# Altium PCB MotorControllerV1.PcbDoc
Units mil, origin at the board's own origin, x right, y up, seen from the top; angles counter-clockwise.
Board outline 2755 x 2065 mil, 2 copper layers (Top Layer, Bottom Layer); 68 components, 38 nets, 220 pads, 58 vias.
Unrouted connection lines stored in the file: 5.
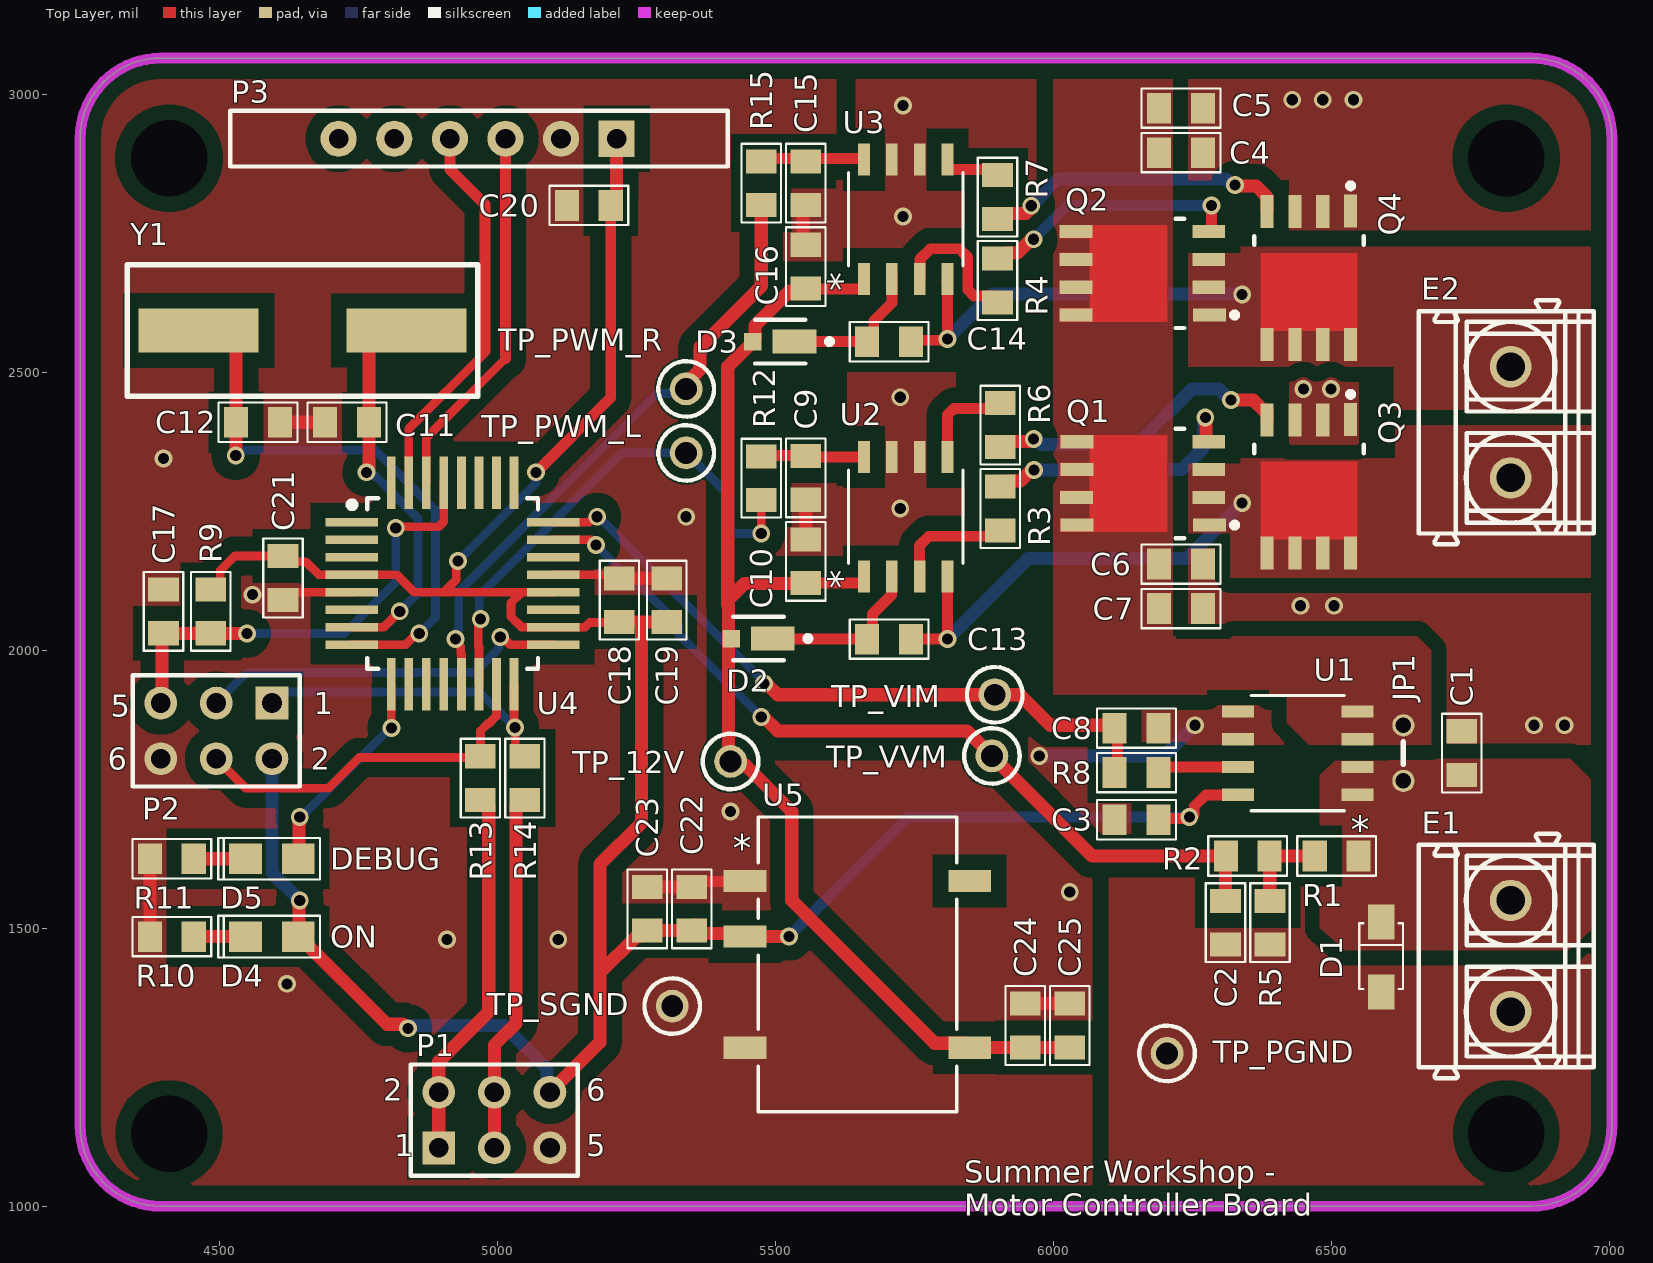
[diagram p0: Top Layer view]
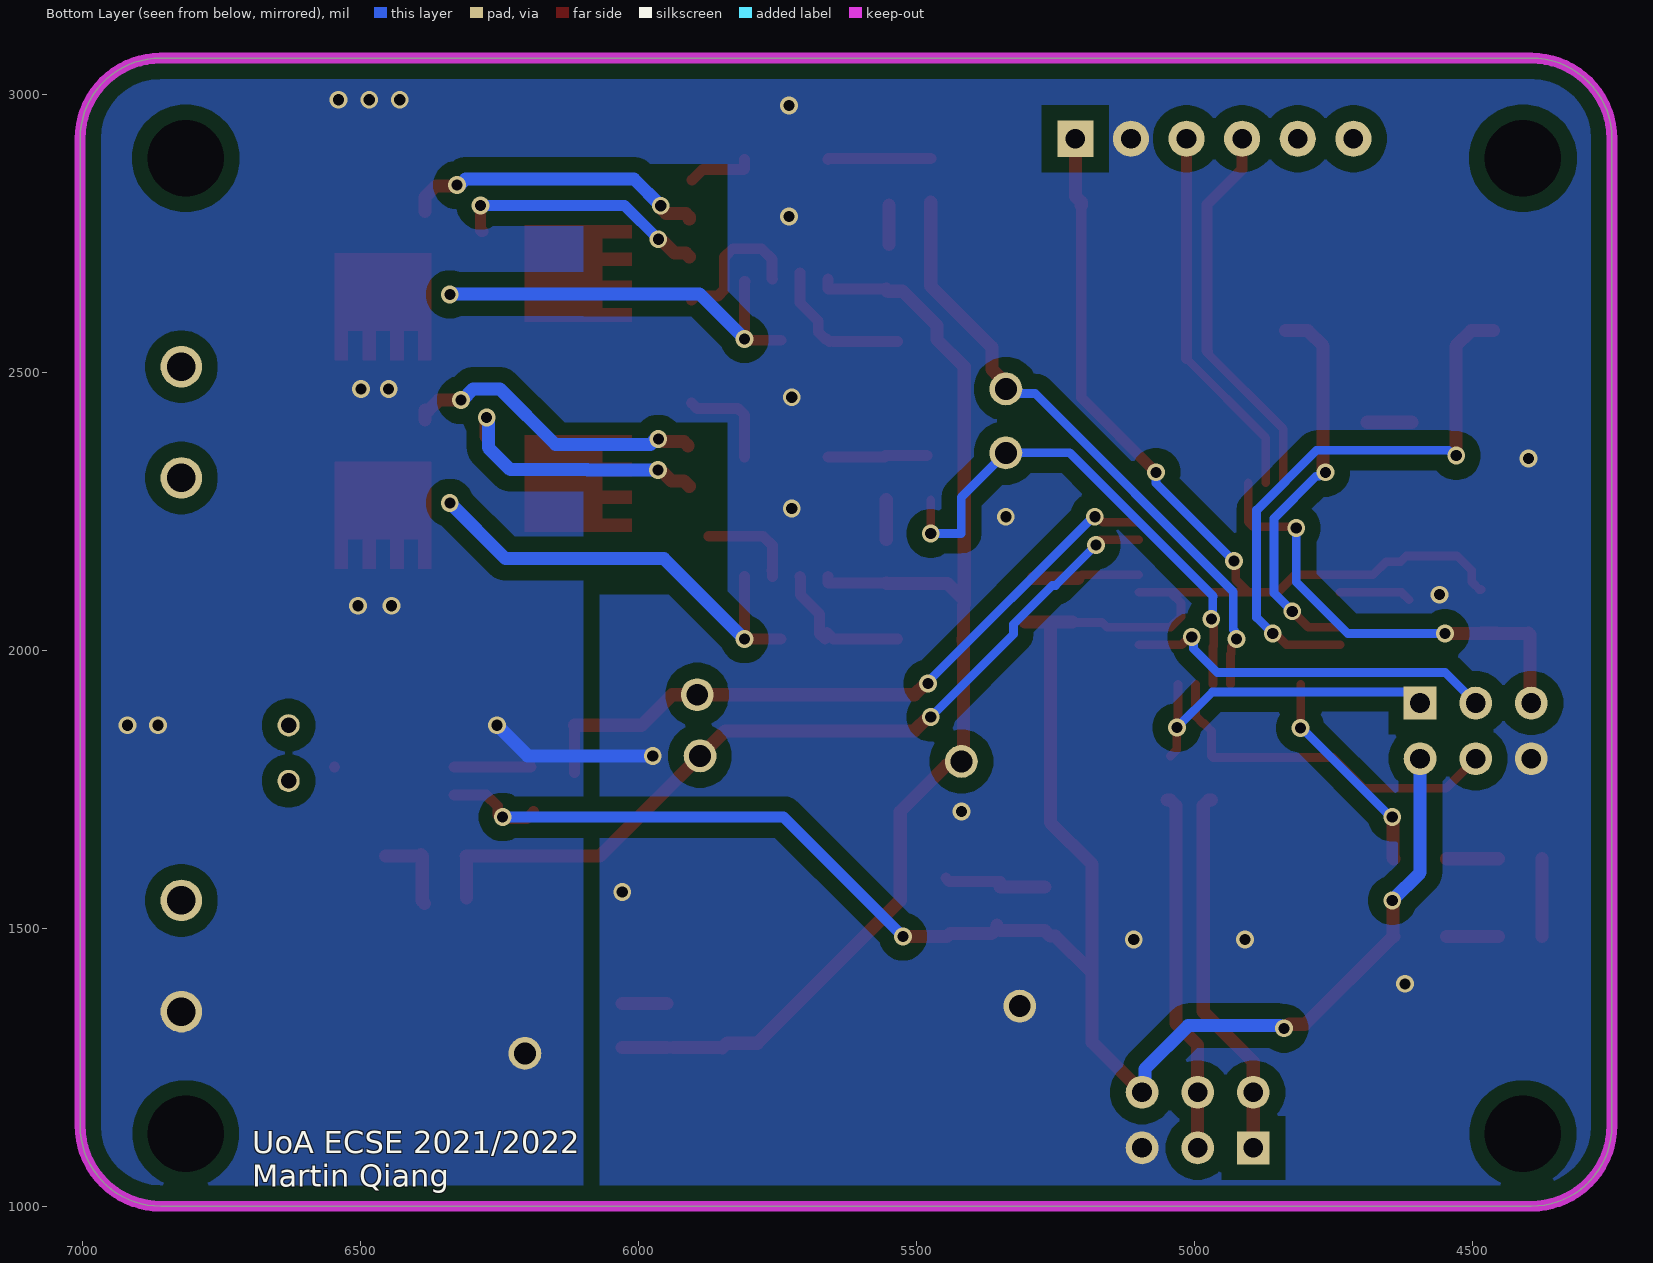
[diagram p1: Bottom Layer view, seen from below]

## Layer stack, top to bottom
Top Solder: solder mask 0.4, Solder Resist, Dk 3.5
Top Layer: signal copper 1.4
Dielectric 1: dielectric 12.6, FR-4, Dk 4.8
Bottom Layer: signal copper 1.4
Bottom Solder: solder mask 0.4, Solder Resist, Dk 3.5

## Board outline
4250,1145 4250,2920 cw(c4395,2920) 4395,3065 6860,3065 cw(c6860,2920) 7005,2920 7005,1145 cw(c6860,1145) 6860,1000 4395,1000 cw(c4395,1145)

## Design rules (kind name [scope] priority, off if disabled: settings)
BoardOutlineClearance [All] p1: gap=19.68 ignorepadtopadclearanceinfootprint=FALSE
Clearance "Polygon Pouring rule" [All] p1: gap=15.75 ignorepadtopadclearanceinfootprint=FALSE except(27.56: Arc-Poly Track-Poly SMDPad-Poly THPad-Poly Via-Poly Fill-Poly Poly-Poly Poly-Region Poly-Text Poly-Hole)
Clearance Clearance_1 [All] p2: gap=15.75 ignorepadtopadclearanceinfootprint=FALSE
Height [All] p1: minheight=0 maxheight=1968.5 prefheight=500
HoleSize [All] p1: absolutevalues=TRUE maxlimit=236.22 minlimit=19.68 maxpercent=80.000 minpercent=20.000
MinimumAnnularRing [All] p1: minimumring=3
MinimumSolderMaskSliver [All] p1: minsoldermaskwidth=3.94
PlaneConnect [All] p1: planeconnectstyle=Relief reliefexpansion=23.62 reliefentries=4 reliefconductorwidth=23.62 reliefairgap=15.75
PolygonConnect PolygonConnect_1 [All] p1: connectstyle=Direct reliefconductorwidth=23.62 reliefentries=4 polygonreliefangle="90 Angle" airgapwidth=15.75
RoutingCorners [All] p1: cornerstyle=Round minsetback=100 maxsetback=100
RoutingVias [All] p1: holewidth=23.62 width=39.37 viastyle="Through Hole" minholewidth=19.68 minwidth=31.5 maxholewidth=39.37 maxwidth=78.74
SilkToSilkClearance [All] p1: silktosilkclearance=3.94
SilkToSolderMaskClearance [IsPad] p1: minsilkscreentomaskgap=3.94 clearancetoexposedcopper=TRUE
SolderMaskExpansion [All] p1: expansion=4 istentingtop=FALSE
Width [All] p1: maxlimit=393.7 minlimit=15.75 preferedwidth=23.62
23 further rules are at their usual default settings.

## Components (designator, comment, footprint, x,y, rotation, side; value= is the part's Value field where it differs from the comment)
C1 "100nF" "0805 CAP" 6735,1815 r90 top
C2 "*" "0805 CAP" 6310,1510 r270 top
C3 "100nF" "0805 CAP" 6150,1695 r180 top
C4 "*" "0805 CAP" 6230,2895 r180 top
C5 "*" "0805 CAP" 6230,2975 r180 top
C6 "*" "0805 CAP" 6230,2155 r180 top
C7 "*" "0805 CAP" 6230,2075 r180 top
C8 "*" "0805 CAP" 6150,1860 r0 top
C9 "*" "0805 CAP" 5555,2310 r90 top
C10 "100nF" "0805 CAP" 5555,2160 r270 top
C11 "22pF" "0805 CAP" 4730,2410 r180 top
C12 "22pF" "0805 CAP" 4570,2410 r0 top
C13 "*" "0805 CAP" 5705,2020 r0 top
C14 "*" "0805 CAP" 5705,2555 r0 top
C15 "*" "0805 CAP" 5555,2840 r90 top
C16 "100nF" "0805 CAP" 5555,2690 r270 top
C17 "*" "0805 CAP" 4400,2070 r90 top
C18 "100nF" "0805 CAP" 5220,2090 r90 top
C19 "100nF" "0805 CAP" 5305,2090 r90 top
C20 "100nF" "0805 CAP" 5165,2800 r180 top
C21 "100nF" "0805 CAP" 4615,2130 r270 top
C22 "100nF" "0805 CAP" 5350,1535 r90 top
C23 "4.7uF" "0805 CAP" 5270,1535 r90 top
C24 "100nF" "0805 CAP" 5950,1325 r90 top
C25 "2.2uF" "0805 CAP" 6030,1325 r90 top
D1 "BZT52H-B4V7" SOD123 6590,1450 r90 top
D2 "MSS1P3L-M3/89A" FP-96591-MFG 5470.28,2021.06 r180 top value=65pF
D3 "MSS1P3L-M3/89A" FP-96591-MFG 5509.21,2555 r180 top value=65pF
D4 "LTST-C170KGKT" "0805 LED" 4595,1485 r180 top
D5 "LTST-C170KGKT" "0805 LED" 4595,1625 r180 top
E1 "Input1" PM_5_08_90_02 6815,1450 r90 top
E2 "Output" PM_5_08_90_02 6815,2410 r90 top
JP1 "0R" "Axial 0.1" 6630,1765 r90 top
P1 "Input from Converter" HDR2X3 4895,1105 r0 top
P2 "ISP Header" HDR2X3 4595,1905 r180 top
P3 "BLE Module Header" HM10_HDR1X6 5215,2920 r180 top
Q1 "IRFH7440TRPBF" Infineon_PG-TDSON-8_MFG#1 6161.1,2300 r180 top
Q2 "IRFH7440TRPBF" Infineon_PG-TDSON-8_MFG#2 6161.1,2677.95 r180 top
Q3 "IRFH7440TRPBF" Infineon_PG-TDSON-8_MFG#2 6460,2295 r270 top
Q4 "IRFH7440TRPBF" Infineon_PG-TDSON-8_MFG#2 6460,2670 r270 top
R1 "*" "0805 RES" 6510,1630 r0 top
R2 "*" "0805 RES" 6350,1630 r180 top
R3 "*" "0805 RES" 5905,2255 r90 top
R4 "*" "0805 RES" 5900,2665 r90 top
R5 "*" "0805 RES" 6390,1510 r270 top
R6 "*" "0805 RES" 5905,2405 r90 top
R7 "*" "0805 RES" 5900,2815 r270 top
R8 "*" "0805 RES" 6150,1780 r180 top
R9 "*" "0805 RES" 4485,2070 r90 top
R10 "*" "0805 RES" 4415,1485 r0 top
R11 "*" "0805 RES" 4415,1625 r0 top
R12 "*" "0805 RES" 5475,2309.37 r270 top
R13 "*" "0805 RES" 4970,1770 r270 top
R14 "*" "0805 RES" 5050,1770 r270 top
R15 "*" "0805 RES" 5475,2840 r270 top
TP_12V "5003" TP_TH 5420,1800 r90 top
TP_PGND "5003" TP_TH 6205,1275 r90 top
TP_PWM_L "5003" TP_TH 5340,2355 r90 top
TP_PWM_R "5003" TP_TH 5340,2470 r90 top
TP_SGND "5003" TP_TH 5315,1360 r90 top
TP_VIM "5003" TP_TH 5895,1920 r90 top
TP_VVM "5003" TP_TH 5890,1810 r90 top
U1 "TMCS1100A4QDR" SOIC8_D_TEX 6440,1815 r180 top
U2 "MIC4605-2YM" MIC4605-2YM 5735,2240 r90 top
U3 "MIC4605-2YM" MIC4605-2YM 5735,2775 r90 top
U4 "ATmega328PB MCU" "32 - TQFP" 4920,2120 r0 top
U5 "ISE0312A" ISE0312A 5648,1435 r0 top
Y1 "SMT-XTAL 16MHz" HC49-US 4650,2575 r180 top

## Footprints (in the part's own frame and the unit in brackets; to place one, negate y for a bottom-side part, rotate by r counter-clockwise, add the part's x,y. Pads: shape width x height; smd on the part's side, far side on the other; paste and mask are expansions set on the pad)
"32 - TQFP" [mm]
  rect 2.4x0.4 smd: 1(-4.6,2.8) 2(-4.6,2) 3(-4.6,1.2) 4(-4.6,0.4) 5(-4.6,-0.4) 6(-4.6,-1.2) 7(-4.6,-2) 8(-4.6,-2.8) 17(4.6,-2.8) 18(4.6,-2) 19(4.6,-1.2) 20(4.6,-0.4) 21(4.6,0.4) 22(4.6,1.2) 23(4.6,2) 24(4.6,2.8)
  rect 0.4x2.4 smd: 9(-2.8,-4.6) 10(-2,-4.6) 11(-1.2,-4.6) 12(-0.4,-4.6) 13(0.4,-4.6) 14(1.2,-4.6) 15(2,-4.6) 16(2.8,-4.6) 25(2.8,4.6) 26(2,4.6) 27(1.2,4.6) 28(0.4,4.6) 29(-0.4,4.6) 30(-1.2,4.6) 31(-2,4.6) 32(-2.8,4.6)
  silkscreen extent -4.74,-3.9 3.9,3.9, body extent -4.5,-4.5 4.5,4.5, height 1.3
"0805 CAP" [mm] "http://www.digikey.co.nz/Web%20Export/Supplier%20Content/Vishay_8026/PDF/VishayBeyschlag_SolderPad.pdf?redirected=1 with dimension G modified by +0.25mm"
  rect 1.1x1.4 smd: 1(-1,0) 2(1,0)
  silkscreen extent -1.8,-0.9 1.8,0.9, body extent -1.04,-0.66 1.04,0.66, height 0.61
"0805 LED" [mm] "RED AS AlGaAs SMD LED, Body; 2mm x 1.25 mm (LxW)"
  rect 1.5x1.4 smd: 1(-1.2,0) 2(1.2,0)
  silkscreen extent -2.2,-0.95 2.45,0.95, body extent -1,-0.63 1,0.63, height 1.1
"0805 RES" [mm] "http://www.digikey.co.nz/Web%20Export/Supplier%20Content/Vishay_8026/PDF/VishayBeyschlag_SolderPad.pdf?redirected=1 with dimension G modified by +0.25mm"
  rect 1.1x1.4 smd: 1(-1,0) 2(1,0)
  silkscreen extent -1.8,-0.9 1.8,0.9, body extent -1.04,-0.66 1.04,0.66, height 0.61
"Axial 0.1" [mil]
  round 40 hole 28: 1(0,0) 2(100,0)
  silkscreen extent 30,0 70,0
FP-96591-MFG [mm]
  rect 2x1.1 smd paste+0 mask+0: 1(-0.65,0)
  rect 0.8x0.8 smd paste+0 mask+0: 2(1.25,0)
  silkscreen extent -2.38,-1 1.15,1, body extent -1.75,-0.8 1.75,0.8, height 0.25
HC49-US [mm] "20Mhz Crystal"
  rect 5.5x2 smd: 1(-4.75,0) 2(4.75,0)
  silkscreen extent -8,-3 8,3, body extent -4.77,-2.4 4.79,2.4, height 3.8
HDR2X3 [mm] "Connector; Header; 3x2 Position"
  rect 1.5x1.5 hole 0.9: 1(0,0)
  round 1.5 hole 0.9: 2(0,2.54) 3(2.54,0) 4(2.54,2.54) 5(5.08,0) 6(5.08,2.54)
  silkscreen extent -1.27,-1.27 6.35,3.81
HM10_HDR1X6 [mil] "Connector; Header; 6 Position"
  rect 65x65 hole 35.43: 1(0,0)
  round 65 hole 35.43: 2(100,0) 3(200,0) 4(300,0) 5(400,0) 6(500,0)
  silkscreen extent -200,-50 695,50, body extent -142,-39 571,228, height 1843
Infineon_PG-TDSON-8_MFG#1 [mm]
  rect 1.5x0.6 smd paste-1000 mask+0: 1(-3.048,1.905) 2(-3.02,0.635) 3(-3.02,-0.635) 4(-3.02,-1.905) 5(2.997,1.905) 6(3.023,0.635) 7(2.997,-0.635) 8(2.997,-1.905)
  Top Layer region: -1.125,2.205 3.77,2.205 3.77,1.605 2.42,1.605 2.42,0.935 3.77,0.935 3.77,0.335 2.42,0.335 2.42,-0.335 3.77,-0.335 3.77,-0.935 2.42,-0.935 2.42,-1.605 3.77,-1.605 3.77,-2.205 -1.125,-2.205
  silkscreen extent -4.33,-2.5 -1.5,2.5, body extent -3.87,-2.68 3.87,2.68, height 0.25
Infineon_PG-TDSON-8_MFG#2 [mm]
  rect 1.5x0.6 smd paste-1000 mask+0: 1(-3.048,1.905) 2(-3.02,0.635) 3(-3.02,-0.635) 4(-3.02,-1.905) 5(3.048,1.905) 6(3.048,0.635) 7(3.048,-0.635) 8(3.048,-1.905)
  Top Layer region: -1.125,2.205 3.77,2.205 3.77,1.605 2.42,1.605 2.42,0.935 3.77,0.935 3.77,0.335 2.42,0.335 2.42,-0.335 3.77,-0.335 3.77,-0.935 2.42,-0.935 2.42,-1.605 3.77,-1.605 3.77,-2.205 -1.125,-2.205
  silkscreen extent -4.33,-2.5 -1.5,2.5, body extent -3.87,-2.68 3.87,2.68, height 0.25
ISE0312A [mil]
  rect 77x40 smd paste+0 mask+0: 1(-202,150) 2(-202,50) 4(-202,-150) 5(202,-150) 8(202,150)
  silkscreen extent -178,-265 178,265, body extent -226,-260 226,260, height 305
MIC4605-2YM [mil]
  rect 57.5x21 smd paste+0 mask+0: 1(-107.25,75) 2(-107.25,25) 3(-107.25,-25) 4(-107.25,-75) 5(107.25,-75) 6(107.25,-25) 7(107.25,25) 8(107.25,75)
  silkscreen extent -84,-103 84,103, body extent -122,-98 122,98, height 66
PM_5_08_90_02 [mm] "PM 5.08/02/90 3.5"
  round 1.9 hole 1.3: A1(-2.54,-0.2) A2(2.54,-0.2)
  silkscreen extent -5.58,-4 5.58,4, body extent -5.58,-4 5.58,4, height 10.01
SOD123 [mm] "SOD-123; 2 Leads; Body 2.7 x 1.6 mm, (LxW)"
  rect 1.6x1.2 smd: 1(-1.65,0) 2(1.55,0)
  silkscreen extent -1.5,-1 1.5,1, body extent -1.8,-0.86 1.8,0.86, height 1.21
SOIC8_D_TEX [mil]
  rect 57.5x22 smd paste+0 mask+0: 1(-107.25,75) 2(-107.25,25) 3(-107.25,-25) 4(-107.25,-75) 5(107.25,-75) 6(107.25,-25) 7(107.25,25) 8(107.25,75)
  silkscreen extent -84,-104 84,104, body extent -122,-99 122,99, height 69
TP_TH [mm] "Test Point, Through Hole, Dia 2.54mm"
  round 1.5 hole 1: 1(0,0)
  silkscreen extent -1.27,-1.27 1.27,1.27, body extent -1.27,-1.27 1.27,1.27, height 4.57

## Part data
C1 C2 C3 C4 C5 C6 C7 C8 C9 C10 C11 C12 C13 C14 C15 C16 C17 C18 C19 C20 C21 C22 C24: library part CerCap_SMT_0805, "SMT ceramic capacitor 0805 size"
C23: library part CerCap_SMT_0805, "SMT ceramic capacitor 0805 size / x7r 4.7uF"
C25: library part CerCap_SMT_0805, "SMT ceramic capacitor 0805 size / x7r, 2.2uF"
D1: library part Zener_SMT_SOD123, "SMT zener diode with SOD123 package", Manufacturer="Nexperia USA Inc.", Manufacturer Part Number=BZT52H-B4V7,115, Operating Temperature="-65°C ~ 150°C (TA)", Package / Case=SOD-123F, Supplier Part Number 1=1727-1611-1-ND, Tolerance=±2%, Category="Discrete Semiconductor Products", ComponentLink1Description=https://assets.nexperia.com/documents/data-sheet/BZT52H_SER.pdf, ComponentLink1URL=https://assets.nexperia.com/documents/data-sheet/BZT52H_SER.pdf, Mounting Type="Surface Mount", Packaging="Cut Tape (CT)", Part Status=Active, Pricing 1="1=0.51, 10=0.408, 100=0.2164, 500=0.14232, 1000=0.09678 (NZD)", RoHS="RoHS Compliant", Stock 1=0, Supplier 1=Digi-Key, Supplier Device Package=SOD-123F
D2 D3: library part Diode_Schottky, "DIODE SCHOTTKY 30V 1A MICROSMP / Rectifier Diode Schottky 30V 1A 2-Pin Micro SMP T/R", Average Rectified Current=1A, Capacitance=65pF, Forward Voltage=500mV, Manufacturer=Vishay, Max Forward Surge Current (Ifsm)=25A, Max Junction Temp=+150°C, Max Operating Temperature=150°C, Max Repetitive Reverse Voltage=30V, Max Reverse Current=250uA, Min Operating Temperature=-55°C, Package=96591, Package Quantity=1, Peak Reverse Current=15uA, Temperature="-55°C to +150°C", Automotive=No, Category=Diode, ComponentLink1Description=https://datasheet.ciiva.com/23642/mss1p3l-23642464.pdf?src-supplier=Newark, ComponentLink1URL=https://datasheet.ciiva.com/23642/mss1p3l-23642464.pdf?src-supplier=Newark, ComponentLink2Description=Datasheet, ComponentLink2URL=http://www.vishay.com/docs/89020/mss1p3l.pdf, ComponentLink3Description=https://datasheet.ciiva.com/917/mss1p3l-917251.pdf?src-supplier=Digi-Key, ComponentLink3URL=https://datasheet.ciiva.com/917/mss1p3l-917251.pdf?src-supplier=Digi-Key, ComponentLink4Description=https://datasheet.ciiva.com/917/mss1p3l-917252.pdf?src-supplier=Digi-Key, ComponentLink4URL=https://datasheet.ciiva.com/917/mss1p3l-917252.pdf?src-supplier=Digi-Key, ComponentLink5Description=https://datasheet.ciiva.com/917/mss1p3l-917253.pdf?src-supplier=Digi-Key, ComponentLink5URL=https://datasheet.ciiva.com/917/mss1p3l-917253.pdf?src-supplier=Digi-Key, ComponentLink6Description=https://datasheet.ciiva.com/8290/mss1p3l-8290391.pdf?src-supplier=Avnet, ComponentLink6URL=https://datasheet.ciiva.com/8290/mss1p3l-8290391.pdf?src-supplier=Avnet, ComponentLink7Description=https://datasheet.ciiva.com/16464/mss1p3l-16464118.pdf?src-supplier=Future+Electronics, ComponentLink7URL=https://datasheet.ciiva.com/16464/mss1p3l-16464118.pdf?src-supplier=Future+Electronics, ComponentLink8Description=https://datasheet.ciiva.com/7962/mss1p3l-7962344.pdf?src-supplier=Element14, ComponentLink8URL=https://datasheet.ciiva.com/7962/mss1p3l-7962344.pdf?src-supplier=Element14, ComponentLink9Description=https://datasheet.ciiva.com/25934/mss1p3l-25934805.pdf?src-supplier=Avnet+Europe, ComponentLink9URL=https://datasheet.ciiva.com/25934/mss1p3l-25934805.pdf?src-supplier=Avnet+Europe, Device Class L1="Discrete Semiconductors", Device Class L2=Diodes, Device Class L3="Schottky Diodes", Digikey Description="DIODE SCHOTTKY 30V 1A MICROSMP", Element Configuration=Single, Footprint Url=http://www.vishay.com/docs/96591/microsmp_do-219ad_fredpt.pdf, Forward Current=1A, Height=0.73mm, Lead Free=Yes, Length=0.09inch, Manufacturer Part Number=MSS1P3L-M3/89A, Max Repetitive Reverse Voltage (Vrrm)=30V, Max Reverse Leakage Current=250uA, Max Reverse Voltage (DC)=30V, Max Surge Current=25A, Max Surge Forward Current=25A, Mount="Surface Mount", Mouser Description="Schottky Diodes & Rectifiers 1.0 Amp 30 Volt", Number of Pins=2, Octopart=https://octopart.com/mss1p3l-m3%2F89a-vishay-42670898, Packaging="Tape and Reel", Peak Non-Repetitive Surge Current=25A, Pricing 1="1=0.30000, 10=0.24800, 100=0.13170, 500=0.08662, 1000=0.05890, 2000=0.05313 (USD)", Radiation Hardening=No, REACH SVHC=Unknown, RoHS=TRUE, RoHS Compliant=Yes, Series=eSMP®, Stock 1=2503, Supplier 1=Digi-Key, Temperature Range High=+150°C, Temperature Range Low=-55°C, Width=0.055inch
D4 D5: library part LED_SMT_0805, "SMT LED 0805 size", Color=Green, Current - Test=20mA, Lens Color=Colorless, Manufacturer="Lite-On Inc.", Millicandela Rating=35mcd, Package / Case="0805 (2012 Metric)", Supplier Part Number 1=160-1414-1-ND, Voltage - Forward (Vf) (Typ)=2V, Category=Optoelectronics, ComponentLink1Description=http://optoelectronics.liteon.com/upload/download/DS22-2000-073/LTST-C170KGKT.pdf, ComponentLink1URL=http://optoelectronics.liteon.com/upload/download/DS22-2000-073/LTST-C170KGKT.pdf, Features=-, Height (Max)=1.10mm, Lens Style/Size="Rectangle with Flat Top, 1.40mm x 1.25mm", Lens Transparency=Clear, Manufacturer Part Number=LTST-C170KGKT, Mounting Type="Surface Mount", Packaging="Cut Tape (CT)", Part Status=Active, Pricing 1="1=0.62, 10=0.459, 25=0.338, 100=0.2415, 250=0.16416, 500=0.14486, 1000=0.11347 (NZD)", RoHS="RoHS Compliant", Size / Dimension="2.00mm L x 1.25mm W", Stock 1=503069, Supplier 1=Digi-Key, Viewing Angle=130°, Wavelength - Dominant=571nm, Wavelength - Peak=574nm
E1 E2: library part 2WayScrewTerminal_5.08mm, "Conn Terminal Block 2 POS 5.08mm Solder ST Thru-Hole 15A Box", Color=Orange, Current=15A, Current Rating=10A, Flammability Rating="UL94 V-0", Manufacturer=Weidmueller, Manufacturer Part Number=1760490000, Max Current Rating=16A, Max Operating Temperature=120°C, Max Supply Voltage=300V, Min Operating Temperature=-50°C, Package Quantity=500, Rated_current_use_group_B_UL_1059="15 A", Rated_voltage_for_surge_voltage_class_pollution_degree_II_2="600 V", Rated_voltage_use_group_B_UL_1059="300 V", UL_94_flammability_rating=V-0, Approvals=CSA,cURus, Category="Terminal Blocks", Colour=Orange, ComponentLink1Description="Manufacturer URL", ComponentLink1URL=http://www.weidmueller.com/, ComponentLink2Description="URL Link1", ComponentLink2URL=http://catalog.weidmueller.com/catalog/Start.do?localeId=en&ObjectID=1760490000, ComponentLink3Description=https://datasheet.ciiva.com/823/1760490000-823936.pdf?src-supplier=Digi-Key, ComponentLink3URL=https://datasheet.ciiva.com/823/1760490000-823936.pdf?src-supplier=Digi-Key, ComponentLink4Description=https://datasheet.ciiva.com/16046/1760490000-pm-5-08-02-90-3-5sn-or-bx-en-pdf-148-16046417.pdf?src-supplier=Onlinecomponents.com, ComponentLink4URL=https://datasheet.ciiva.com/16046/1760490000-pm-5-08-02-90-3-5sn-or-bx-en-pdf-148-16046417.pdf?src-supplier=Onlinecomponents.com, Connector Type="PCB,Terminal Block", Contact Material="Copper Alloy", Contact Plating=Tin, Contact_material=Cu-Leg, Contact_surface=tinned, Depth=8mm, Hole Diameter=1.3mm, Housing Color=Orange, Housing Material=Thermoplastic, Insulating_material="Wemid (PA)", Lead Free="Lead Free", Length=11.16mm, Mount="Through Hole", Mounting_onto_the_PCB="Solder connection", No_of_poles=2, Number of Circuits=2, Number of Contacts=2, Number of Levels=1, Number of Poles=2, Number of Positions=2, Number of Positions Per Level=2, Number of Rows=1, Orientation=Straight, PackageReference=PM_5_08_90_02, Packaging=Box, PartNumber=1760490000, Pitch=508mm, Pitch_inch="0,2 inch", Pitch_mm="5,08 mm", Pricing 1="1=1.00000, 10=0.70300, 25=0.65560, 50=0.59500, 100=0.59230, 250=0.50016, 500=0.47384, 1000=0.42120, 5000=0.38025 (USD)", Qty="500 PCS", Radiation Hardening=No, REACH SVHC="No SVHC", Revision=V1, RoHS=Yes, Series=PM, Short_text_for_material="PM 5.08/02/90 3.5SN OR BX", Side_termination_characteristic="closed side", Solder_pin_length_mm="3,5 mm", Solid_max_H05_07_V_U="2,5 mm²", Solid_min_H05_07_V_U="0,13 mm²", Stock 1=2610, Stripping Length=6mm, Supplier 1=Digi-Key, Termination=Solder, Voltage=300V, Voltage Rating=300V, Width=8mm, Wire Gauge (Max)=26AWG, Wire Gauge (Min)=14AWG, Wire/Cable Gauge=24AWG, Wire_cross_section_AWG_max_UL_1059="AWG 14", Wire_cross_section_AWG_min_UL_1059="AWG 26"
JP1: library part Jumper
P1 P2: library part "Header 3X2", "Header, 3-Pin, Dual row", LatestRevisionDate=17-Jul-2002, LatestRevisionNote="Re-released for DXP Platform.", Publisher="Altium Limited"
P3: library part BLEModule_TH, "2.54mm pitch 6-pin header for BLE module", LatestRevisionDate=17-Jul-2002, LatestRevisionNote="Re-released for DXP Platform.", Publisher="Altium Limited"
Q1 Q2 Q3 Q4: "Single N-Channel 40 V 2.4 mOhm 92 nC HEXFET® Power Mosfet - PQFN 5 x 6 mm", Case/Package="QFN EP", Continuous Drain Current (ID)=85A, Drain to Source Breakdown Voltage=40V, Drain to Source Resistance=2.4mR, Drain-source On Resistance-Max=2.4MR, Gate to Source Voltage (Vgs)=20V, Input Capacitance=4.574nF, Manufacturer="International Rectifier", Max Operating Temperature=150°C, Max Power Dissipation=104W, Min Operating Temperature=-55°C, Package Quantity=4000, Threshold Voltage=2.2V, Category=MOSFETs, ComponentLink1Description=https://datasheet.ciiva.com/30480/0900766b811ccaf7-30480025.pdf?src-supplier=RSComponents, ComponentLink1URL=https://datasheet.ciiva.com/30480/0900766b811ccaf7-30480025.pdf?src-supplier=RSComponents, ComponentLink2Description=https://datasheet.ciiva.com/16390/irfh7440pbf-16390391.pdf?src-supplier=Future+Electronics, ComponentLink2URL=https://datasheet.ciiva.com/16390/irfh7440pbf-16390391.pdf?src-supplier=Future+Electronics, ComponentLink3Description=https://datasheet.ciiva.com/6371/irfh7440pbf-6371293.pdf?src-supplier=Digi-Key, ComponentLink3URL=https://datasheet.ciiva.com/6371/irfh7440pbf-6371293.pdf?src-supplier=Digi-Key, Drain to Source Voltage (Vdss)=40V, Fall Time=42ns, Height=1.17mm, Lead Free="Lead Free", Length=5.85mm, Manufacturer Part Number=IRFH7440TRPBF, Mount="Surface Mount", Number of Elements=1, Number of Pins=8, On-State Resistance=2.4MR, Packaging="Tape and Reel", Power Dissipation=104W, Radiation Hardening=No, Rds On Max=2.4mR, REACH SVHC="No SVHC", Rise Time=45ns, RoHS=Yes, RoHS Compliant=Yes, Series=StrongIRFET™, Supplier 1=Newark, Turn-Off Delay Time=53ns, Turn-On Delay Time=12ns, Width=5mm
R1 R2 R3 R4 R5 R6 R7 R8 R9 R10 R11 R12 R13 R14 R15: library part Res_SMT_0805, "0805 resistor", ComponentLink1Description=https://nz.mouser.com/datasheet/2/315/AOA0000C304-1149620.pdf, LatestRevisionDate=17-Jul-2002, LatestRevisionNote="Re-released for DXP Platform.", PackageReference=AXIAL-0.4, Published=8-Jun-2000, Publisher="Altium Limited"
TP_12V TP_PGND TP_PWM_L TP_PWM_R TP_SGND TP_VIM TP_VVM: library part TestPoint, "Test Point, Orange, 1-Pin THD, RoHS", Forward Current="3 A", Forward Voltage="1.08 V", Max Operating Temperature="150 degC", Max Surge Current="80 A", Min Operating Temperature="-65 degC", Package Quantity=500, Peak Reverse Current="600 uA", ComponentLink1Description="Manufacturer URL", ComponentLink1URL=http://www.keyelco.com/, ComponentLink2Description=Datasheet, ComponentLink2URL=http://keyelco.com/userAssets/file/M65p56.pdf, DatasheetVersion=Jun-15, Diameter="5.3 mm", Height="0.25 inch", Length="9.5 mm", Mount="Through Hole", PackageDescription="1-Pin Through Hole Device, Dia 2.54 mm", PackageReference=5003, Packaging=Bulk, Pins=2, Radiation Hardening=No, REACH SVHC="No SVHC", RoHSCompliant=true, Weight="0.01 lb", Width="0.25 inch"
U1: "Precision isolated current sensor with external reference 8-SOIC -40 to 125", Manufacturer="Texas Instruments", Category="Integrated Circuits (ICs)", Manufacturer Part Number=TMCS1100A4QDR, Pricing 1="1=4.42000, 10=3.97300, 25=3.75640, 100=3.25550, 250=3.08856, 500=2.77136, 1000=2.75625 (USD)", RoHS=Yes, Stock 1=2103, Supplier 1=Digi-Key
U2 U3: "Driver 1A 2-OUT High and Low Side Half Brdg Non-Inv 8-Pin SOIC N Tube", Case/Package=SOIC, Manufacturer=Microchip, Manufacturer Part Number=MIC4605-2YM-T5, Max Operating Temperature=125°C, Max Output Current=1A, Max Supply Voltage=16V, Min Operating Temperature=-40°C, Min Supply Voltage=5.5V, Nominal Supply Current=135uA, Output Voltage=1.9V, Package Quantity=500, Category="Gate Drivers", Channel Type=Independent, ComponentLink1Description=https://datasheet.ciiva.com/26948/getdatasheetpartid-789737-26948139.pdf?src-supplier=Verical, ComponentLink1URL=https://datasheet.ciiva.com/26948/getdatasheetpartid-789737-26948139.pdf?src-supplier=Verical, ComponentLink2Description=https://datasheet.ciiva.com/28655/1785059-28655117.pdf?src-supplier=Element14, ComponentLink2URL=https://datasheet.ciiva.com/28655/1785059-28655117.pdf?src-supplier=Element14, Element Configuration=Single, Fall Time=20ns, Height=1.63mm, Lead Free="Lead Free", Length=4.93mm, Mount="Surface Mount", Number of Drivers=2, Number of Outputs=1, Number of Pins=8, Packaging="Tape and Reel", Pricing 1="1=1.39000 (USD)", Pricing 2="1=0.95000, 25=0.78440, 100=0.72080 (USD)", Propagation Delay=35ns, Radiation Hardening=No, REACH SVHC="No SVHC", Rise Time=20ns, RoHS=Yes, RoHS Compliant=Yes, Stock 2=88, Supplier 1=Digi-Key, Supplier 2=Digi-Key, Width=3.94mm
U4: library part ATmega328PB_SMT_TQFP32, "IC MCU 8BIT 32KB FLASH 32TQFP", Manufacturer=Atmel, Manufacturer Part Number=ATMEGA328PB-AN, Operating Temperature="-40°C ~ 105°C (TA)", Package / Case=32-TQFP, Supplier Device Package="32-TQFP (7x7)", Supplier Part Number 1=ATMEGA328PB-AN-ND, Voltage - Supply (Vcc/Vdd)="1.8 V ~ 5.5 V", Category="Integrated Circuits (ICs)", ComponentLink1Description=http://www.atmel.com/images/atmel-42397-8-bit-avr-microcontroller-atmega328pb_datasheet.pdf, ComponentLink1URL=http://www.atmel.com/images/atmel-42397-8-bit-avr-microcontroller-atmega328pb_datasheet.pdf, Connectivity="I²C, SPI, UART/USART", Core Processor=AVR, Core Size=8-Bit, Data Converters="A/D 8x10b", EEPROM Size="1K x 8", Number of I/O=27, Oscillator Type=Internal, Packaging=Tray, Part Status=Active, Peripherals="Brown-out Detect/Reset, POR, PWM, WDT", Pricing 1="1=2.74, 10=2.448, 25=2.2032, 100=2.0074, 250=1.81152, 500=1.62548, 1000=1.37088 (USD)", Program Memory Size="32KB (16K x 16)", Program Memory Type=FLASH, RAM Size="2K x 8", RoHS="RoHS Compliant", Speed=20MHz, Stock 1=366, Supplier 1=Digi-Key
U5: "3V - 12V Dc-dc Converter, 1W Sdm, Single O/p, Unreg", Case/Package=SMD/SMT, Current - Output 1=84mA, Isolation Voltage=1.5kV, Manufacturer="XP Power", Max Input Voltage=3.63V, Max Operating Temperature=105°C, Max Output Power=1W, Min Input Voltage=2.97V, Min Operating Temperature=-40°C, Voltage - Output 1=12V, Category="Board Mount Modules", ComponentLink1Description=http://www.farnell.com/datasheets/2334158.pdf?src-supplier=Farnell, ComponentLink1URL=http://www.farnell.com/datasheets/2334158.pdf?src-supplier=Farnell, ComponentLink2Description=http://www.alliedelec.com/m/d/c82960fec94d011cb1647333c66d561d.pdf?src-supplier=Allied+Electronics, ComponentLink2URL=http://www.alliedelec.com/m/d/c82960fec94d011cb1647333c66d561d.pdf?src-supplier=Allied+Electronics, ComponentLink3Description=https://www.xppower.com/Portals/0/pdfs/SF_ISE.pdf?src-supplier=Digi-Key, ComponentLink3URL=https://www.xppower.com/Portals/0/pdfs/SF_ISE.pdf?src-supplier=Digi-Key, ComponentLink4Description=http://www.farnell.com/datasheets/1903566.pdf?src-supplier=Element14, ComponentLink4URL=http://www.farnell.com/datasheets/1903566.pdf?src-supplier=Element14, ComponentLink5Description=http://www.farnell.com/datasheets/2334158.pdf?src-supplier=Newark, ComponentLink5URL=http://www.farnell.com/datasheets/2334158.pdf?src-supplier=Newark, Depth=12.7mm, Efficiency=80%, Features=SCP, Height=0.29inch, Length=0.5inch, Manufacturer Part Number=ISE0312A, Max Input Voltage (DC)=3.63V, Max Output Current=84mA, Max Power Dissipation=1W, Min Input Voltage (DC)=2.97V, Mount="Surface Mount,PCB", Number of Outputs=1, Output Power=1W, Packaging=Rail/Tube, Pricing 1="1=4.29000, 5=4.16400, 10=4.03500, 25=3.86320, 100=3.61200 (USD)", REACH SVHC=Unknown, RoHS=Yes, RoHS Compliant=Yes, Stock 1=1649, Supplier 1=Digi-Key, Width=0.44inch
Y1: library part TXC9C-16_XTAL_SMT, "9C-16.000MAAJ-T crystal 16.0000MHZ 18PF SMD", Frequency Stability=±30ppm, Load Capacitance=18pF, Manufacturer="TXC CORPORATION", Manufacturer Part Number=9C-16.000MAAJ-T, Operating Mode=Fundamental, Operating Temperature="-20°C ~ 70°C", Package / Case=HC-49/US, Ratings=-, Supplier Part Number 1=887-1059-1-ND, Category="Crystals, Oscillators, Resonators", ComponentLink1Description=http://www.txccorp.com/download/products/quartz_crystals/2015TXC_9C_32.pdf, ComponentLink1URL=http://www.txccorp.com/download/products/quartz_crystals/2015TXC_9C_32.pdf, Frequency Tolerance=±30ppm, Height - Seated (Max)="0.161\" (4.10mm)", Mounting Type="Surface Mount", Packaging="Cut Tape (CT)", Part Status=Active, Pricing 1="1=0.75, 10=0.628, 50=0.5656, 100=0.5026, 500=0.47744 (NZD)", RoHS="RoHS Compliant", Size / Dimension="0.449\" L x 0.189\" W (11.40mm x 4.80mm)", Stock 1=11514, Supplier 1=Digi-Key, Type="MHz Crystal"

## Free pads (board coordinates)
  round 60 hole 137.8: 14(4410,1130.57) 14(4410,2885) 14(6815,1130.57) 14(6815,2885)

## Via types
v1: diameter 32, hole 20, Top Layer to Bottom Layer, 58 vias

## Nets (pads, with @x,y where several pads share a name; then routed paths per layer and width w, separated by ;. In a path a pad name is that pad's centre, name@x,y a point inside that pad or via, vN(x,y) a via of type N, cw(c..) or ccw(c..) an arc to the next point about the centre after c; other vN are vias at no path point)
3V3: C3.1 C18.1 C19.1 C20.1 C21.1 C22.1 C23.1 D4.1 P1.6 P2.2 P3.1 R9.2 U1.8 U4.4 U4.18 U4.20 U5.2 | length 5193.9
  Top Layer w15.75: R9.2 4488.28,2109.37 4502.06,2123.15 4502.06,2143.44 4527.99,2169.37 4620,2169.37 4630.1,2159.27 4656.03,2159.27 4679.55,2135.75 4782.88,2135.75 4819.25,2135.75 4850.75,2104.25 4904.25,2104.25 ; v1(4929.71,2160.29) 4926.6,2157.18 4926.6,2126.6 4904.25,2104.25 ; U4.20 5044.07,2104.25 ; C18.1@5225.73,2050 5166.87,2050 5158.13,2041.26 5145.09,2041.26 5044.07,2041.26 5025,2060.33 5025,2085.18 5044.07,2104.25 ; 4904.25,2104.25 5044.07,2104.25
  Top Layer w19.68: v1(5070,2320) 5204.37,2454.37 C20.1 ; C3.1@6189.37,1710 6189.37,1709.31 6201.18,1697.5 6242.5,1697.5 v1(6245,1700) ; v1@6250,1700 6253.89,1703.89 6253.89,1719.41 6274.47,1740 U1.8
  Top Layer w23.62: v1(4645,1550) 4643.62,1548.62 4643.62,1486.38 D4.1 4644.21,1485 4801.92,1327.29 4830.44,1327.29 4837.73,1320 v1(4840,1320) ; P1.6 5185,1295 5185,1420 ; C20.1 5204.37,2805.91 5215,2816.54 P3.1 ; C18.1 5259.37,2050.63 ; C23.1@5269.64,1495.63 C23.1 ; C19.1 5259.37,2050.63 ; C22.1 C23.1 ; C22.1@5355.91,1505.47 5355.91,1500.16 5365.75,1490.32 5440.69,1490.32 U5.2 v1(5525,1485) ; 5185,1420 5185,1615 5260,1690 5260,2050 5259.37,2050.63 ; 5185,1420 5250.79,1485.79 5260.16,1485.79 C23.1
  Bottom Layer w15.75: v1(4929.71,2160.29) 5070,2300.58 v1(5070,2320)
  Bottom Layer w19.68: v1(5525,1485) 5740,1700 v1@6250,1700
  Bottom Layer w23.62: P2.2 4595,1600 v1(4645,1550) ; v1(4840,1320) 4842.27,1320 4847.23,1324.96 5011.91,1324.96 5090,1246.87 P1.6@5090,1195
12V: C10.2 C16.2 C24.1 C25.1 D2.2 D3.2 TP_12V.1 U2.1 U3.1 U5.5 | length 2206.8
  Top Layer w19.68: C16.2@5555,2644.21 C16.2@5555,2645 ; C16.2@5555,2650 5659.34,2650 5660,2650.66 U3.1 ; C10.2@5565,2120.63 5659.34,2120.63 5660,2121.29 U2.1 ; U5.5 5850.31,1285.31 U5.5@5852.31,1285.31
  Top Layer w23.62: D2.2@5416.06,2021.06 5416.06,2081.06 5414.88,2082.24 5414.88,2094.88 5414.88,2154.88 5414.88,2509.88 5463.94,2558.94 5463.94,2584.13 5484.02,2604.21 5525.59,2645.79 5551.57,2645.79 C16.2@5555,2649.21 ; D2.2@5417.13,2021.06 5417.13,2017.13 5416.06,2016.06 5416.06,1803.94 5426.78,1793.22 5446.78,1793.22 5530,1710 5530,1550 5786.82,1293.18 5841.82,1293.18 U5.5 ; 5419.88,2094.88 5444.84,2119.84 5554.21,2119.84 C10.2 ; U5.5@5852.31,1285.31 C24.1@5938.94,1285.31 ; C24.1 C25.1
GND: C1.2 C2.2 C3.2 C4.1 C5.1 C6.1 C7.1 C8.2 C9.1 C10.1 C11.2 C12.2 C15.1 C16.1 C17.2 C18.2 C19.2 C20.2 C21.2 C22.2 C23.2 C24.2 C25.2 D1.1 E1.A1 P1.5 P2.6 P3.2 Q3.1 Q3.2 Q3.3 Q4.1 Q4.2 Q4.3 R5.2 R10.1 R11.1 TP_PGND.1 TP_SGND.1 U1.5 U1.6 U2.6 U2.7 U3.6 U3.7 U4.5 U4.21 U5.1 U5.4 | length 1247.3
  Top Layer w15.75: C21.2 4628.62,2104.25 U4.5 ; U4.21 5203.62,2135.75 C18.2@5210,2129.37
  Top Layer w19.68: C22.2@5350,1584.37 5442.37,1584.37 U5.1@5448,1590
  Top Layer w23.62: R10.1 R11.1 ; C12.2 C11.2 ; C18.2@5210,2129.37 C18.2 C19.2@5290,2129.37 ; C23.2 C22.2 ; C16.1@5550,2730 C15.1@5550,2800.63 ; C10.1 C9.1 ; C24.2 C25.2
  Bottom Layer w23.62: v1(5975,1810) 6200,1810 v1(6255,1865)
  other v1: 4622.27,1400 4910,1480 5110,1480 6030,1565 5420,1710 6865,1865 6920,1865 6445,2080 6505,2080 4560,2100 5340,2240 5725,2255 4400,2345 5725,2455 6450,2470 6500,2470 5730,2780 5730,2980 6430,2990 6485,2990 6540,2990
HB_left: C13.1 D2.1 U2.2 | length 263
  Top Layer w19.68: D2.1@5534.8,2020 5650,2020 C13.1@5661.81,2031.81 ; C13.1 5675,2029.37 5675,2065 5709.34,2099.34 5709.34,2132.09 U2.2
HB_right: C14.1 D3.1 U3.2 | length 262.9
  Top Layer w19.68: D3.1 C14.1@5650.63,2555 ; C14.1@5657.44,2555 5662.44,2560 5664.72,2560 5677.44,2572.72 5677.44,2592.44 5710,2625 U3.2@5710,2678.96
HO_left: R3.1 U2.3 | length 177.6
  Top Layer w19.68: U2.3 5760,2188.47 5776.53,2205 5874.1,2205 ; U2.3@5760,2142.75 U2.3@5760.66,2143.41
HO_right: R4.1 U3.3 | length 260.4
  Top Layer w19.68: U3.3 5760.66,2668.41 5760.66,2703.47 5779.28,2722.09 5831.1,2722.09 5846.09,2707.1 5846.09,2703.91 5846.47,2703.53 5846.47,2648.97 5858,2637.44 5897.93,2637.44 R4.1@5905.37,2630
HS_left: C13.2 E2.A1 Q1.1 Q1.2 Q1.3 Q3.5 Q3.6 Q3.7 Q3.8 U2.4 | length 809.9
  Top Layer w19.68: C13.2 v1(5810,2020) U2.4
  Bottom Layer w23.62: v1(5810,2020) 5955,2165 6240,2165 v1(6340,2265)
HS_right: C14.2 E2.A2 Q2.1 Q2.2 Q2.3 Q4.5 Q4.6 Q4.7 Q4.8 U3.4 | length 734.3
  Top Layer w19.68: C14.2@5744.37,2557.5 5807.5,2557.5 v1(5810,2560) 5810,2662.98 U3.4@5809.34,2663.64
  Bottom Layer w23.62: v1(5810,2560) 5890.73,2640.73 6339.27,2640.73 v1(6340,2640)
LED: D5.1 U4.9 | length 386.4
  Top Layer w15.75: U4.9 4809.76,1860.24 v1(4810,1860)
  Top Layer w23.62: D5.1 4643.62,1626.38 4643.62,1698.62 v1(4645,1700)
  Bottom Layer w15.75: v1(4645,1700) 4647.5,1700 4807.5,1860 v1(4810,1860)
LO_left: R6.2 U2.5 | length 179.9
  Top Layer w19.68: U2.5 5810,2423.47 5821.53,2435 5895.63,2435 R6.2
LO_right: R7.1 U3.5 | length 118.9
  Top Layer w19.68: U3.5 5810,2865.66 5810.66,2865 5885,2865 R7.1@5904.12,2845.88
MISO: P2.1 R14.1 U4.16 | length 606.6
  Top Layer w15.75: v1@5030.24,1861.01 U4.16 ; v1(5032.43,1861.01) 5032.43,1821.04 R14.1@5044.09,1809.37
  Bottom Layer w15.75: P2.1 4615,1925 4968.44,1925 v1(5032.43,1861.01)
MOSI: P2.4 R13.1 U4.15 | length 663.2
  Top Layer w15.75: P2.4 4548.15,1751.85 4696.85,1751.85 4752.19,1807.19 4967.81,1807.19 R13.1 4970,1854.65 4983.39,1868.03 4984.9,1868.03 4998.74,1881.87 4998.74,1899.53 U4.15
NetC9_2: C9.2 R12.1 U2.8 | length 180.9
  Top Layer w19.68: R12.1@5481.72,2350 C9.2@5556.72,2350 ; C9.2 5557.12,2347.25 U2.8
NetC15_2: C15.2 R15.1 U3.8 | length 186.7
  Top Layer w19.68: R15.1@5475,2884.37 5555,2884.37 5659.34,2884.37 5660,2883.71 U3.8
NetD4_2: D4.2 R10.2 | length 93.4
  Top Layer w23.62: R10.2 D4.2
NetD5_2: D5.2 R11.2 | length 93.4
  Top Layer w23.62: R11.2 D5.2
NetQ1_4: Q1.4 R3.2 | length 480
  Top Layer w23.62: R3.2@5909.37,2295 5918.58,2304.21 5941.09,2304.21 5961.13,2324.25 v1(5965.56,2324.25) ; v1(6273.8,2418.8) 6275,2417.6 Q1.4@6275,2385
  Bottom Layer w23.62: v1(5965.56,2324.25) 6092.23,2324.25 6092.98,2325 6231.16,2325 6270.67,2364.51 6270.67,2415.67 v1(6273.8,2418.8)
NetQ2_4: Q2.4 R4.2 | length 464.7
  Top Layer w19.68: Q2.4 6283.03,2752.95 6285,2754.92 v1(6285,2800)
  Top Layer w23.62: R4.2@5909.37,2707.83 5915.75,2714.21 5935.53,2714.21 5960.57,2739.25 v1(5965,2739.25)
  Bottom Layer w19.68: v1(5965,2739.25) 6025.75,2800 v1(6285,2800)
NetQ3_4: Q3.4 R6.1 | length 557.7
  Top Layer w23.62: R6.1@5911.56,2367.82 5919.21,2375.47 5956.04,2375.47 5960.57,2380 v1(5965,2380) ; v1(6320,2450) 6360,2450 6378.39,2431.61 6385,2431.61 Q3.4
  Bottom Layer w23.62: v1(5965,2380) 5969.43,2380 5979.43,2370 6150,2370 6250,2470 6297.97,2470 6317.97,2450 v1(6320,2450)
NetQ4_4: Q4.4 R7.2 | length 549.7
  Top Layer w23.62: R7.2@5909.37,2775.49 5909.37,2779.09 5915.75,2785.47 5951.04,2785.47 5960.64,2795.07 v1(5960.64,2799.36) ; v1(6326.95,2836.71) 6328.66,2835 6365,2835 6385,2815 Q4.4
  Bottom Layer w23.62: v1(5960.64,2799.36) 6008.83,2847.56 6311.67,2847.56 6322.52,2836.71 v1(6326.95,2836.71)
NetR1_1: R1.1 R2.1 R5.1 | length 150.9
  Top Layer w23.62: R5.1@6385.44,1544.81 R5.1@6389.69,1549.06 ; R5.1@6389.69,1554.06 6389.69,1629.69 R2.1 R2.1@6392.19,1632.81 ; R2.1@6390.78,1630 R1.1@6455.63,1630
NetR8_1: R8.1 U1.7 | length 138.4
  Top Layer w19.68: R8.1@6194.37,1790 U1.7
RST: C17.1 P2.5 R9.1 U4.29 | length 842
  Top Layer w15.75: v1(4817.8,2220) 4819.93,2222.13 4895.03,2222.13 4904.25,2231.35 U4.29
  Top Layer w23.62: P2.5 4397.5,1907.5 4397.5,2028.13 C17.1 ; C17.1@4400.31,2030.32 4457.29,2030.32 ; 4457.29,2030.63 R9.1 4485.31,2030.32 4549.69,2030.32 v1(4550,2030)
  Bottom Layer w15.75: v1(4550,2030) 4725,2030 4817.8,2122.8 v1(4817.8,2220)
RX: P3.3 U4.30 | length 677.8
  Top Layer w15.75: U4.30 4872.76,2382.38 5015,2524.62
  Top Layer w19.68: 5015,2524.62 P3.3
RX_Converter: P1.1 P1.2 R13.2 | length 672.1
  Top Layer w23.62: P1.1 P1.2 4895,1260 4985,1350 4985,1720.79 4975.16,1730.63 R13.2
SCK: P2.3 U4.17 | length 671.7
  Top Layer w15.75: v1(5005.58,2023.72) 5009.98,2023.72 5023.93,2009.76 U4.17
  Bottom Layer w15.75: P2.3 4550,1960 4960,1960 5002.47,2002.47 5002.47,2020.61 v1(5005.58,2023.72)
TX: P3.4 U4.31 | length 701.8
  Top Layer w15.75: U4.31 4841.26,2398.21 4977.73,2534.67 4977.73,2537.46
  Top Layer w19.68: P3.4 4915.15,2919.85 4915.15,2864.85 4978.24,2801.76 4978.24,2537.97 4977.73,2537.46
TX_Converter: P1.3 P1.4 R14.2 | length 651.9
  Top Layer w23.62: P1.3 P1.4 4995,1290 5034.25,1329.25 5034.25,1720.79 5044.09,1730.63 R14.2
Vim: C8.1 R8.2 TP_VIM.1 U4.24 | length 1260.7
  Top Layer w15.75: U4.24 5165.84,2230.24 5175.6,2240 v1(5180,2240)
  Top Layer w19.68: R8.2@6115.63,1780 C8.1@6115.63,1865
  Top Layer w23.62: v1(5480,1940) 5484.43,1940 5504.43,1920 TP_VIM.1 5940,1920 5995,1865 C8.1@6115.63,1865
  Bottom Layer w15.75: v1(5180,2240) 5183.09,2240 5480,1943.09 v1(5480,1940)
Vin: C1.1 D1.2 E1.A2 JP1.1 R1.2 U1.1 U1.2 | length 0.4
  Top Layer w19.68: U1.2 U1.2@6547.56,1789.69
Vpwm_L: R12.2 TP_PWM_L.1 U4.14 | length 935
  Top Layer w15.75: U4.14 4967.24,2006.02 4965.96,2007.3 4965.96,2047.17 4970.45,2051.66 v1(4970.45,2056.06) ; v1(5475,2210) R12.2
  Bottom Layer w15.75: v1(4970.45,2056.06) 4968.1,2058.41 4968.1,2095.68 4966.89,2096.89 5225,2355 TP_PWM_L.1 5420,2275 5420,2210 v1(5475,2210)
Vpwm_R: R15.2 TP_PWM_R.1 U4.13 | length 1104.9
  Top Layer w15.75: v1(4925,2020) 4925,2015.6 4934.46,2006.14 4934.46,1994.26 4935.75,1992.98 U4.13
  Top Layer w23.62: TP_PWM_R.1@5335,2475 5335.41,2475 5357.31,2496.9 5357.31,2497.31 5365,2505 5365,2545 5475,2655 R15.2@5475,2805.63
  Bottom Layer w15.75: v1(4925,2020) 4928.11,2023.11 4928.11,2034.6 4930.83,2037.32 4930.83,2105.38 5287.17,2461.71 5323.87,2461.71 TP_PWM_R.1@5325.29,2460.29
Vsn: C4.2 C5.2 C6.2 C7.2 JP1.2 Q1.5 Q1.6 Q1.7 Q1.8 Q2.5 Q2.6 Q2.7 Q2.8 U1.3 U1.4
Vvm: C2.1 R2.2 TP_VVM.1 U4.23 | length 1532.1
  Top Layer w15.75: U4.23 5170,2198.74 5177.84,2190.9 v1(5177.84,2189.22)
  Top Layer w23.62: v1(5475,1880) 5479.43,1880 5504.43,1855 5845,1855 6069.84,1630.16 R2.2@6310.63,1630.16 ; C2.1@6310,1554.37 6310.31,1554.68 R2.2@6310.31,1629.68
  Bottom Layer w15.75: v1(5177.84,2189.22) 5250.61,2116.44 5256.7,2116.44 5326.36,2046.78 5326.36,2028.64 v1(5475,1880)
X1: C11.1 U4.7 Y1.1 | length 714
  Top Layer w15.75: U4.7 4796.26,2041.26 v1(4825,2070)
  Top Layer w23.62: v1(4765,2320) 4765,2322.27 4769.37,2326.64 C11.1 4769.37,2547.44 4796.93,2575 Y1.1
  Bottom Layer w15.75: v1(4765,2320) 4769.4,2320 4776.67,2312.73 4782.27,2312.73 4857.51,2237.49 4857.51,2102.51 v1(4825,2070)
X2: C12.1 U4.8 Y1.2 | length 1047.8
  Top Layer w15.75: U4.8 4835.37,2009.76 4855.6,2030 v1(4860,2030)
  Top Layer w23.62: Y1.2 4503.07,2575 4530.63,2547.44 C12.1 4530.31,2409.68 4530.31,2350.31 v1(4530,2350)
  Bottom Layer w15.75: v1(4530,2350) 4534.4,2350 4544.02,2359.62 4781.41,2359.62 4889.01,2252.03 4889.01,2059.01 v1(4860,2030)
pads on no net: P3.5 P3.6 U4.1 U4.2 U4.3 U4.6 U4.10 U4.11 U4.12 U4.19 U4.22 U4.25 U4.26 U4.27 U4.28 U4.32 U5.8

## Polygon pours and split planes (outlines as drawn)
GND on Top Layer "GND_L01_P035" (solid, pour order 35): 5630,2500 5825,2500 5825,2295 5630,2295
GND on Top Layer "GND_L01_P032" (solid, pour order 32): 5610,2295 5840,2295 5840,2170 5610,2170
GND on Top Layer "POWER_GND_L01_P013" (solid, remove dead copper, pour order 13): 6240,2190 7000,2190 7000,1830 6240,1830
GND on Top Layer "SGND_L01_P026" (solid, remove dead copper, pour order 26): 4275,3035 5610,3035 5610,1000 4275,1000
Vsn on Top Layer "VSN_L01_P015" (solid, pour order 15): 6680,1925 6680,1830 6460,1830 6420,1870 6420,1925
Vsn on Top Layer "VSN_L01_P014" (solid, pour order 14): 6000,2025 6000,1920 6680,1920 6680,2000 6655,2025
Vin on Top Layer "VIN_L01_P000" (solid, pour order 0): 6510,1805 6930,1805 6970,1765 6970,1498.89 6926.25,1460 6525,1460 6480,1500 6480,1775
HS_left on Top Layer "HS_LEFT_L01_P007" (solid, pour order 7): 6240,2345 7000,2345 7000,2130 6240,2130
HS_left on Top Layer "HS_LEFT_L01_P008" (solid, pour order 8): 6615,2342.5 6985,2342.5 6985,2405 6615,2405
GND on Top Layer "GND_L01_P038" (solid, pour order 38): 5500,1000 6070,1000 6070,1801.16 5500,1801.16
GND on Top Layer "GND_L01_P027" (solid, remove dead copper, pour order 27): 5955,1850.73 6145,1850.04 6145,1650 5955,1650
GND on Top Layer "POWER_GND_L01_P006" (solid, pour order 6): 6415,3035 6980,3035 6980,2755 6415,2755
GND on Top Layer "POWER_GND_L01_P023" (solid, pour order 23): 7000,1650 6100,1650 6100,1000 7000,1000
GND on Top Layer "GND_L01_P034" (solid, pour order 34): 5645,3035 5645,2845 5970,2845 5970,3035
GND on Top Layer "GND_L01_P030" (solid, pour order 30): 5610,2845 5840,2845 5840,2700 5610,2700
GND on Top Layer "POWER_GND_L01_P011" (solid, pour order 11): 6415,3035 6220,3035 6220,2845 6415,2845
GND on Top Layer "POWER_GND_L01_P005" (solid, pour order 5): 6425,2495 6550,2495 6550,2370 6425,2370
Vsn on Top Layer "Vsn_L01_P-001" (solid, remove dead copper, pour order 1): 6000,3035 6000,2025 6215,2025 6215,3035
HS_right on Top Layer "HS_RIGHT_L01_P009" (solid, pour order 9): 6240,2725.39 6989.61,2725.39 7000,2715 7000,2510 6240,2510
HS_right on Top Layer "HS_RIGHT_L01_P010" (solid, pour order 10): 6612.5,2510 6990,2510 6990,2420 6612.5,2420
GND on Top Layer "POWER_GND_L01_P016" (solid, pour order 16): 6155,1905 6155,1830 6375,1830 6375,1905
GND on Bottom Layer "POWER_GND_L02_P025" (solid, remove dead copper, pour order 25): 6990,3038.35 6990,1005 6100,1005 6100,3038.35
GND on Bottom Layer "LOGIC_GND_L02_P028" (solid, pour order 28): 5840,1019.36 5840,3035 4270,3035 4270,1015
GND on Bottom Layer "GND_L02_P033" (solid, pour order 33): 6100,3035 6100,2874.71 6099.71,2875 5645,2875 5645,3035
GND on Bottom Layer "GND_L02_P037" (solid, pour order 37): 5610,1020.07 6069.93,1020.07 6070,1020 6070,2100 5610,2100
GND on Bottom Layer "GND_L02_P036" (solid, pour order 36): 6100,2409.71 5630.29,2409.71 5630,2410 5630,2600 6100,2600

## Keep-outs
Keep-Out Layer:
  the board outline again, w19.68

## Silkscreen, mask and mechanical layers (free items; w line width, h text height)
Top Overlay:
  text "DEBUG" at 4700,1605 h40
  text "ON" at 4700,1465 h40
  text "Summer Workshop - / Motor Controller Board" at 5840,982.71 h40
Bottom Overlay:
  text "UoA ECSE 2021/2022 / Martin Qiang" at 6695,1035 h40
Mechanical 1:
  lines w19.68: 4250,1145 ccw(c4395,1145) 4395,1000 6860,1000 ccw(c6860,1145) 7005,1145 7005,2920 ccw(c6860,2920) 6860,3065 4390,3065 ccw(c4390,2925) 4250,2925 4250,1145

## Text inside footprints (layer, text, board x,y; h text height)
P1: Top Overlay "6" at 5160,1190 h40; Top Overlay "5" at 5160,1090 h40; Top Overlay "2" at 4795,1190 h40; Top Overlay "1" at 4815,1090 h40
P2: Top Overlay "6" at 4300,1785 h40; Top Overlay "5" at 4305,1880 h40; Top Overlay "2" at 4665,1785 h40; Top Overlay "1" at 4670,1885 h40
U1: Top Overlay "*" at 6569.75,1723 h50 r180; Mechanical 13 "*" at 6516,1769.5 h50 r180
U2: Top Overlay "*" at 5644,2110.25 h50 r90; Mechanical 13 "*" at 5690,2164 h50 r90
U3: Top Overlay "*" at 5644,2645.25 h50 r90; Mechanical 13 "*" at 5690,2699 h50 r90
U5: Top Overlay "*" at 5423.5,1620 h50; Mechanical 13 "*" at 5477,1642 h50